# Altium PCB ASB.PcbDoc (part 1 of 2)
Units mm, origin at the board's own origin, x right, y up, seen from the top; angles counter-clockwise.
Board outline 200 x 150 mm, 4 copper layers (Top Layer, Int1 (GND), Int2, Bottom Layer), stack 1.369 mm thick; 134 components, 97 nets, 431 pads, 0 vias.
Unrouted connection lines stored in the file: 248.
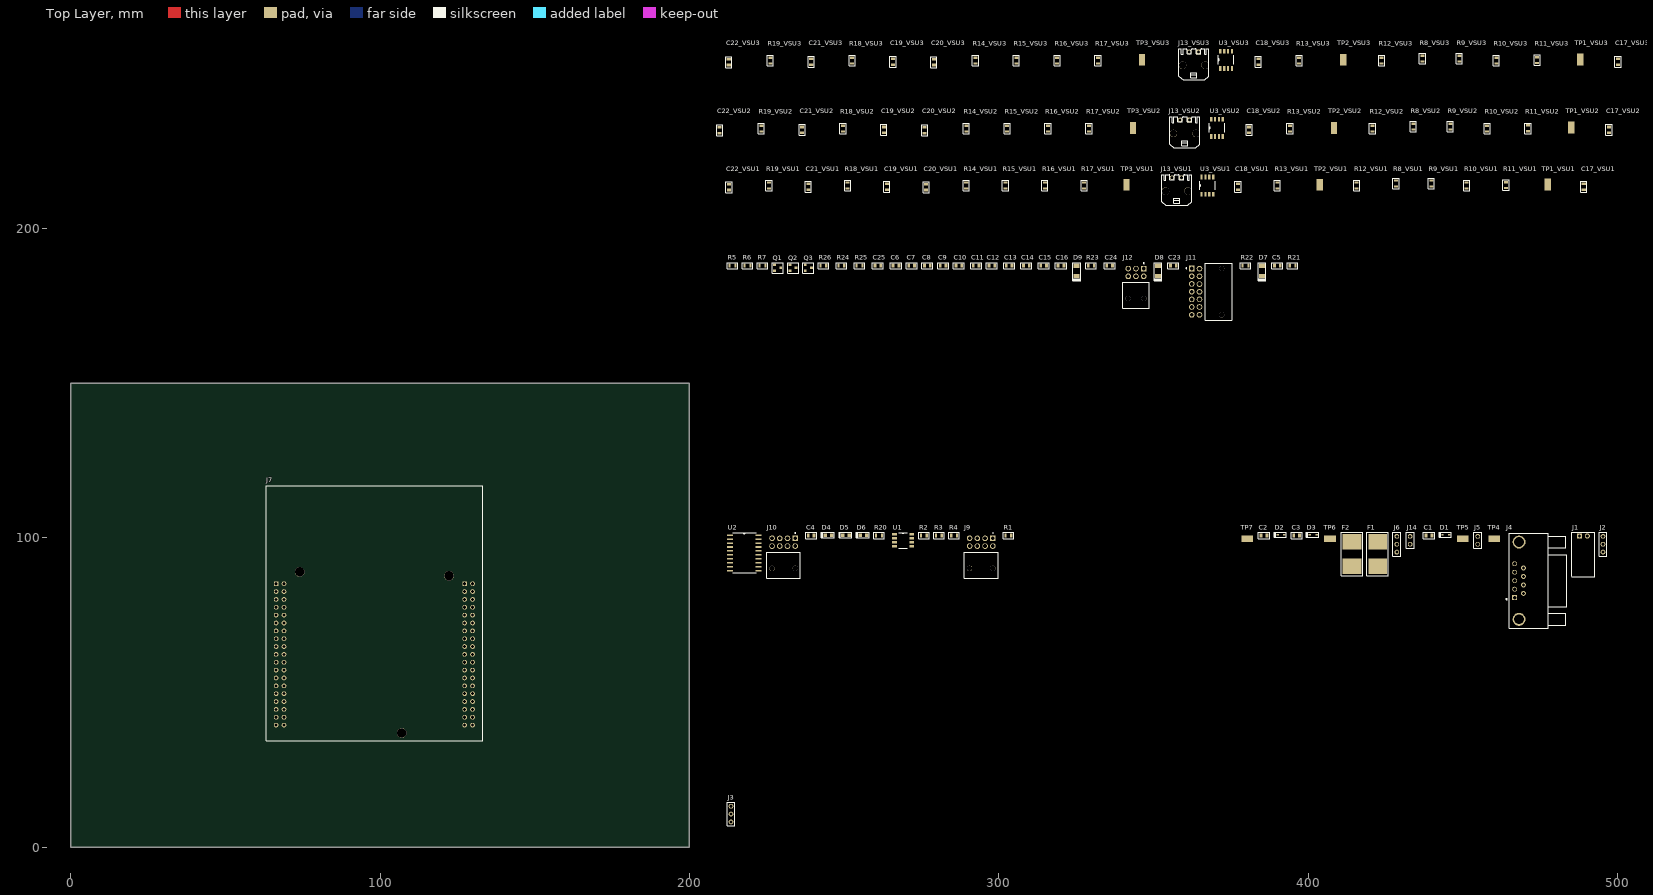
[diagram p0: Top Layer view]
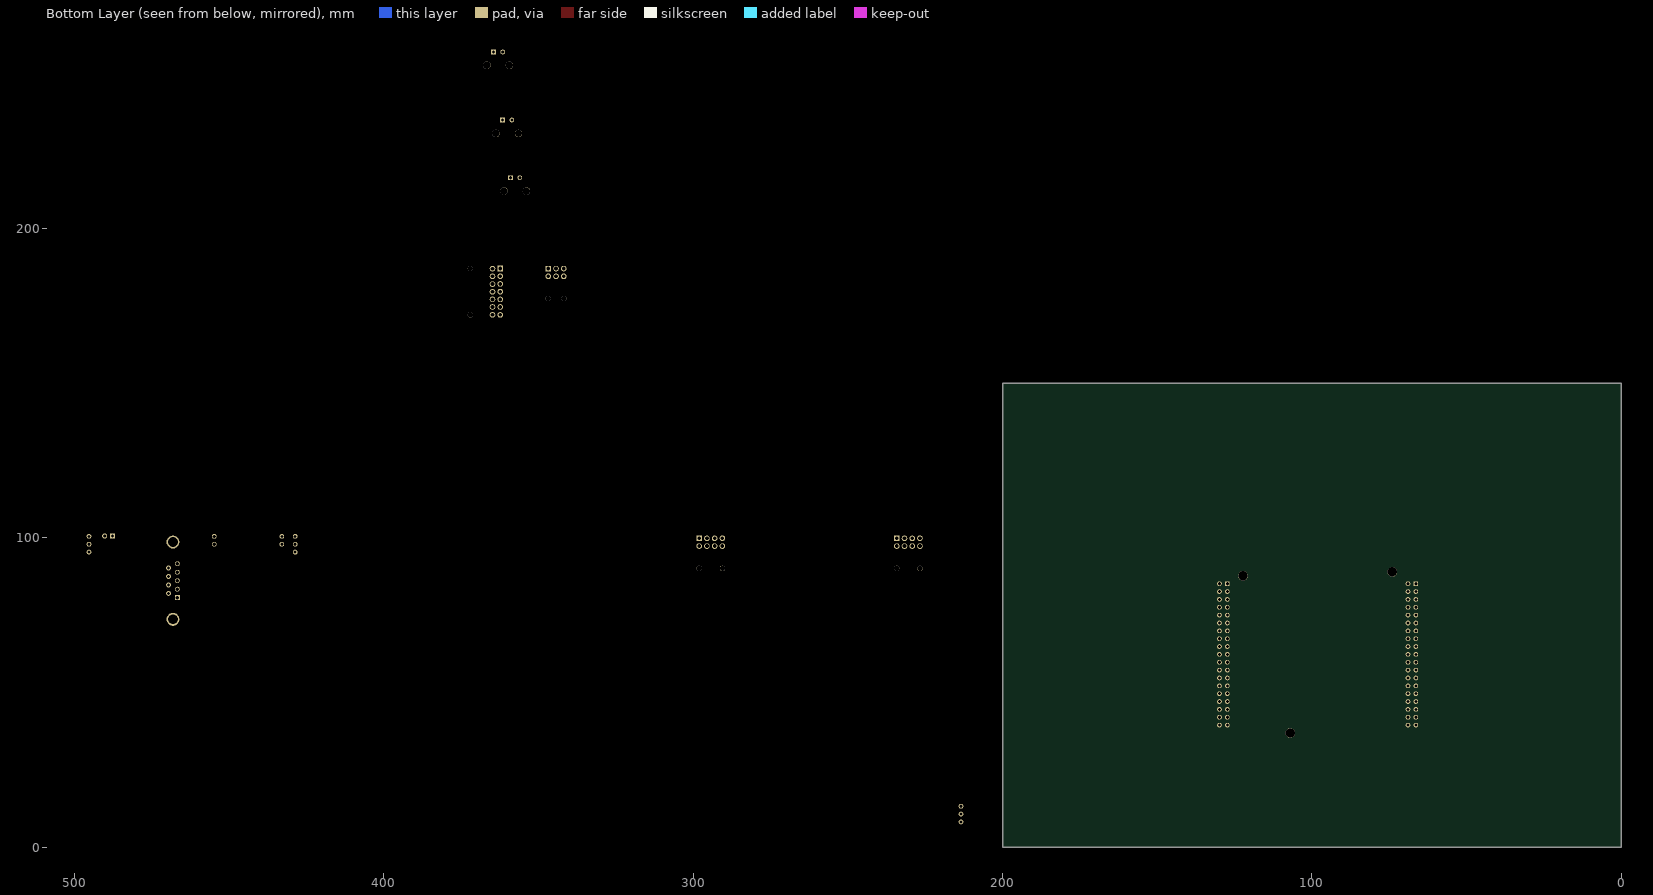
[diagram p1: Bottom Layer view, seen from below]
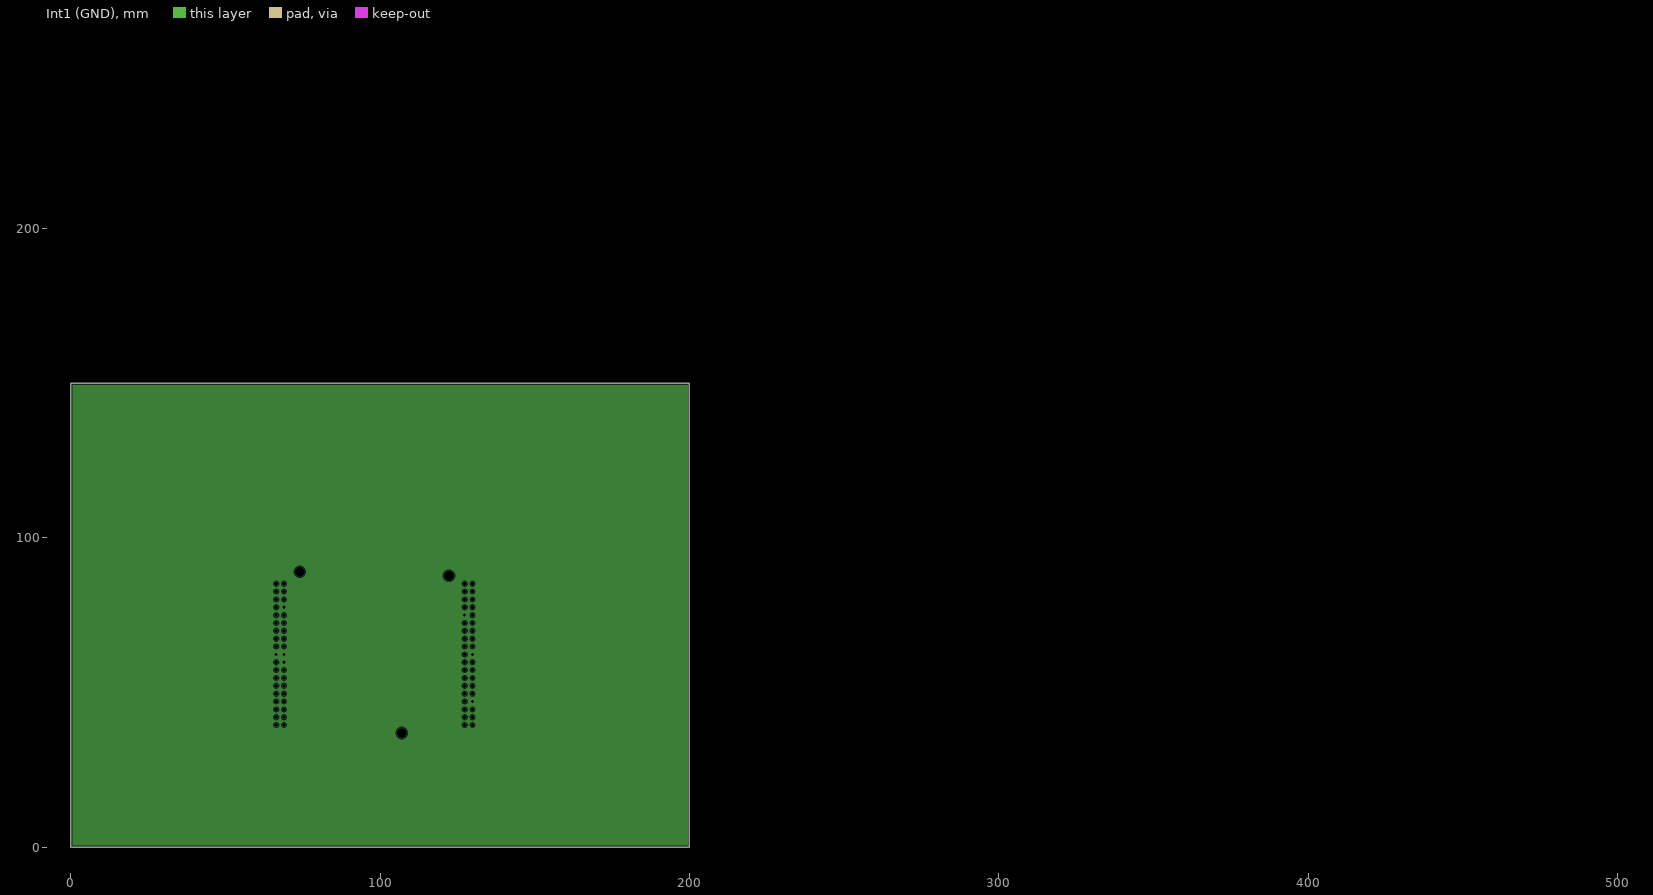
[diagram p2: Int1 (GND), clearances drawn from the general rule]

## Layer stack, top to bottom
Top Solder: solder mask 0.0254, SM-001, Dk 4
Top Layer: signal copper 0.035
Dielectric 1: prepreg 0.1295, PP-017, Dk 4.3
Dielectric 2: prepreg 0.1295, PP-017, Dk 4.3
Int1 (GND): plane copper 0.035, net GND
Dielectric 3: core 0.7112, Core-039, Dk 4.8
Int2: signal copper 0.035
Dielectric 4: prepreg 0.1295, PP-017, Dk 4.3
Dielectric 5: prepreg 0.1295, PP-017, Dk 4.3
Bottom Layer: signal copper 0.035
Bottom Solder: solder mask 0.0254, SM-001, Dk 4

## Board outline
0,0 200,0 200,150 0,150

## Design rules (kind name [scope] priority, off if disabled: settings)
Clearance [All] p1: gap=0.3 ignorepadtopadclearanceinfootprint=TRUE
PlaneClearance [All] p1: clearance=0.508
PlaneConnect [All] p1: planeconnectstyle=Relief reliefexpansion=0.5 reliefentries=4 reliefconductorwidth=0.25 reliefairgap=0.25
PolygonConnect [All] p1: connectstyle=Relief reliefconductorwidth=0.254 reliefentries=4 polygonreliefangle="90 Angle" airgapwidth=0.254
RoomDefinition VSU3 [InComponentClass('VSU3')] p1: confinementstyle=ConfineIn formatcopy=TRUE lockcomponents=FALSE outline 211.448,247.838 511.295,247.838 511.295,261.173 211.448,261.173
RoomDefinition VSU2 [InComponentClass('VSU2')] p2: confinementstyle=ConfineIn formatcopy=TRUE lockcomponents=FALSE outline 208.51,225.838 508.357,225.838 508.357,239.173 208.51,239.173
RoomDefinition VSU1 [InComponentClass('VSU1')] p3: confinementstyle=ConfineIn formatcopy=TRUE lockcomponents=FALSE outline 211.524,207.192 499.687,207.192 499.687,220.527 211.524,220.527
RoomDefinition ASB [InComponentClass('ASB')] p4 off: confinementstyle=ConfineIn formatcopy=TRUE lockcomponents=FALSE outline 211.916,6.644 497.285,6.644 497.285,191.81 211.916,191.81
RoutingVias [All] p1: holewidth=0.6 width=1 viastyle="Through Hole" minholewidth=0.6 minwidth=1 maxholewidth=0.6 maxwidth=1
SolderMaskExpansion [All] p1: expansion=0.102
UnRoutedNet [All] p1: checkbadconnections=TRUE
Width Width_Power [(InNet('3.3V') OR InNet('5V') OR InNet('12V') OR InNet('Ext 3V3') OR InNet('Ext 5V') OR InNet('GND') OR InNet('STM3V3_Out') OR InNet('STM5V_In') OR InNet('STM5V_Out') OR InNet('STM_VIN'))] p1: maxlimit=0.5 minlimit=0.4 preferedwidth=0.5
Width [All] p2: maxlimit=0.4 minlimit=0.2 preferedwidth=0.3
27 further rules are at their usual default settings.

## Classes and differential pairs
channel class "Voltage Sense Unit": VSU1 VSU2 VSU3
component class VSU3: C17_VSU3 C18_VSU3 C19_VSU3 C20_VSU3 C21_VSU3 C22_VSU3 J13_VSU3 R8_VSU3 R9_VSU3 R10_VSU3 R11_VSU3 R12_VSU3 R13_VSU3 R14_VSU3 R15_VSU3 R16_VSU3 R17_VSU3 R18_VSU3 R19_VSU3 TP1_VSU3 TP2_VSU3 TP3_VSU3 U3_VSU3
component class VSU2: C17_VSU2 C18_VSU2 C19_VSU2 C20_VSU2 C21_VSU2 C22_VSU2 J13_VSU2 R8_VSU2 R9_VSU2 R10_VSU2 R11_VSU2 R12_VSU2 R13_VSU2 R14_VSU2 R15_VSU2 R16_VSU2 R17_VSU2 R18_VSU2 R19_VSU2 TP1_VSU2 TP2_VSU2 TP3_VSU2 U3_VSU2
component class VSU1: C17_VSU1 C18_VSU1 C19_VSU1 C20_VSU1 C21_VSU1 C22_VSU1 J13_VSU1 R8_VSU1 R9_VSU1 R10_VSU1 R11_VSU1 R12_VSU1 R13_VSU1 R14_VSU1 R15_VSU1 R16_VSU1 R17_VSU1 R18_VSU1 R19_VSU1 TP1_VSU1 TP2_VSU1 TP3_VSU1 U3_VSU1
component class ASB: C1 C2 C3 C4 C5 C6 C7 C8 C9 C10 C11 C12 C13 C14 C15 C16 C23 C24 C25 D1 D2 D3 D4 D5 D6 D7 D8 D9 F1 F2 J1 J2 J3 J4 J5 J6 J7 J9 J10 J11 J12 J14 Q1 Q2 Q3 R1 R2 R3 R4 R5 R6 R7 R20 R21 R22 R23 R24 R25 R26 TP4 TP5 TP6 TP7 U1 U2

## Components (designator, comment, footprint, x,y, rotation, side; value= is the part's Value field where it differs from the comment)
C1 "10nF" C0805 439.119,100.751 r0 top
C2 "10nF" C0805 385.779,100.751 r0 top
C3 "10nF" C0805 396.32,100.751 r0 top
C4 "0.1uF" C0805 239.348,100.751 r0 top
C5 "1uF" C0805 390.097,188 r0 top
C6 "1nF" C0805 266.78,188 r0 top
C7 "1nF" C0805 271.86,188 r0 top
C8 "1nF" C0805 276.94,188 r0 top
C9 "1nF" C0805 282.02,188 r0 top
C10 "1nF" C0805 287.1,188 r0 top
C11 "1nF" C0805 292.688,188 r0 top
C12 "1nF" C0805 297.768,188 r0 top
C13 "1nF" C0805 303.356,188 r0 top
C14 "1nF" C0805 308.944,188 r0 top
C15 "1nF" C0805 314.532,188 r0 top
C16 "1nF" C0805 320.12,188 r0 top
C17_VSU1 "0.33uF" C0805 489.146,213.542 r90 top (schematic designator C17)
C17_VSU2 "0.33uF" C0805 497.308,231.934 r90 top (schematic designator C17)
C17_VSU3 "0.33uF" C0805 500.246,253.934 r90 top (schematic designator C17)
C18_VSU1 "0.33uF" C0805 377.386,213.542 r90 top (schematic designator C18)
C18_VSU2 "0.33uF" C0805 380.976,231.934 r90 top (schematic designator C18)
C18_VSU3 "0.33uF" C0805 383.914,253.934 r90 top (schematic designator C18)
C19_VSU1 "0.1uF" C0805 263.848,213.542 r90 top (schematic designator C19)
C19_VSU2 "0.1uF" C0805 262.866,231.934 r90 top (schematic designator C19)
C19_VSU3 "0.1uF" C0805 265.804,253.934 r90 top (schematic designator C19)
C20_VSU1 "0.1uF" C0805 276.548,213.415 r90 top (schematic designator C20)
C20_VSU2 "0.1uF" C0805 276.074,231.807 r90 top (schematic designator C20)
C20_VSU3 "0.1uF" C0805 279.012,253.807 r90 top (schematic designator C20)
C21_VSU1 "0.33uF" C0805 238.448,213.542 r90 top (schematic designator C21)
C21_VSU2 "0.33uF" C0805 236.45,231.934 r90 top (schematic designator C21)
C21_VSU3 "0.33uF" C0805 239.388,253.934 r90 top (schematic designator C21)
C22_VSU1 "0.33uF" C0805 212.794,213.415 r90 top (schematic designator C22)
C22_VSU2 "0.33uF" C0805 209.78,231.807 r90 top (schematic designator C22)
C22_VSU3 "0.33uF" C0805 212.718,253.807 r90 top (schematic designator C22)
C23 "0.1uF" C0805 356.442,188 r0 top
C24 "0.1uF" C0805 335.868,188 r0 top
C25 "0.1uF" C0805 260.938,188 r0 top
D1 "TVS Diode 12V" SOD-323 444.58,101.005 r0 top
D2 "TVS Diode 3V3" SOD-323 391.24,101.005 r0 top
D3 "TVS Diode 5V" SOD-323 401.654,101.005 r0 top
D4 "Green LED" L0805 244.936,100.878 r0 top
D5 "Yellow LED" L0805 250.651,100.878 r0 top
D6 "Red LED" L0805 256.239,100.878 r0 top
D7 "Diode 50V 1A" CGRKM4001-HF 385.144,186.349 r90 top
D8 "Diode 50V 1A" CGRKM4001-HF 351.489,186.349 r90 top
D9 "Diode 50V 1A" CGRKM4001-HF 325.2,186.349 r90 top
F1 "Fuseholder" "SCHURTER - 0031.7701.11 - FUSE HOLDER, PCB MOUNT" 422.482,94.782 r90 top
F2 "Fuseholder" "SCHURTER - 0031.7701.11 - FUSE HOLDER, PCB MOUNT" 414.227,94.782 r90 top
J1 "1x2 Header, RA, Shrouded" MOLEX_0705530001 487.76,100.624 r0 top
J2 "1x3 HDR100" "MOLEX 0901200763" 495.38,95.417 r90 top
J3 "1x3 HDR100" "MOLEX 0901200763" 213.44,8.168 r90 top
J4 "D-Sub9 Header, RA" "D9 Connector" 473.409,86.273 r90 top
J5 "1x2 HDR100" "Molex 0901200762" 454.867,97.957 r90 top
J6 "1x3 HDR100" "MOLEX 0901200763" 428.705,95.417 r90 top
J7 "(2x19 Morpho Socket) x2" "STM32 Nucleo Footprint]" 98.13,75.68 r0 top
J9 "2x4 Socket, RA" "Molex 105314 8 CON" 294.339,95.417 r0 top
J10 "2x4 Socket, RA" "Molex 105314 8 CON" 230.458,95.417 r0 top
J11 "2x7 Socket, RA" "MOLEX 105314 14 CON" 362.411,187.111 r90 top
J12 "2x3 Socket, RA" "MOLEX 105314 6 CON" 344.377,182.666 r0 top
J13_VSU1 "1x2 Header, RA" "Right Angle Header 43650-0205(Primary)" 357.574,212.145 r0 top (schematic designator J13)
J13_VSU2 "1x2 Header, RA" "Right Angle Header 43650-0205(Primary)" 360.148,230.791 r0 top (schematic designator J13)
J13_VSU3 "1x2 Header, RA" "Right Angle Header 43650-0205(Primary)" 363.086,252.791 r0 top (schematic designator J13)
J14 "1x2 HDR100" "Molex 0901200762" 433.023,97.957 r90 top
Q1 "DMG6968U" "MOSFET DMG6968UDICT-ND" 227.537,188.254 r0 top
Q2 "DMG6968U" "MOSFET DMG6968UDICT-ND" 232.49,188.254 r0 top
Q3 "DMG6968U" "MOSFET DMG6968UDICT-ND" 237.443,188.254 r0 top
R1 "1K" R0805 303.102,100.751 r0 top
R2 "150" R0805 275.797,100.751 r0 top
R3 "150" R0805 280.623,100.751 r0 top
R4 "150" R0805 285.576,100.751 r0 top
R5 "20K" R0805 213.948,188 r0 top
R6 "20K" R0805 218.774,188 r0 top
R7 "20K" R0805 223.6,188 r0 top
R8_VSU1 "3K" R0805 428.44,214.558 r90 top (schematic designator R8)
R8_VSU2 "3K" R0805 434.062,232.95 r90 top (schematic designator R8)
R8_VSU3 "3K" R0805 437,254.95 r90 top (schematic designator R8)
R9_VSU1 "3K" R0805 439.87,214.558 r90 top (schematic designator R9)
R9_VSU2 "3K" R0805 446,232.95 r90 top (schematic designator R9)
R9_VSU3 "3K" R0805 448.938,254.95 r90 top (schematic designator R9)
R10_VSU1 "3K" R0805 451.3,213.923 r90 top (schematic designator R10)
R10_VSU2 "3K" R0805 457.938,232.315 r90 top (schematic designator R10)
R10_VSU3 "3K" R0805 460.876,254.315 r90 top (schematic designator R10)
R11_VSU1 "20K" R0805 464,214.05 r90 top (schematic designator R11)
R11_VSU2 "20K" R0805 471.146,232.442 r90 top (schematic designator R11)
R11_VSU3 "20K" R0805 474.084,254.442 r90 top (schematic designator R11)
R12_VSU1 "6.2K" R0805 415.74,213.923 r90 top (schematic designator R12)
R12_VSU2 "6.2K" R0805 420.854,232.315 r90 top (schematic designator R12)
R12_VSU3 "6.2K" R0805 423.792,254.315 r90 top (schematic designator R12)
R13_VSU1 "1K" R0805 390.086,213.923 r90 top (schematic designator R13)
R13_VSU2 "1K" R0805 394.184,232.315 r90 top (schematic designator R13)
R13_VSU3 "1K" R0805 397.122,254.315 r90 top (schematic designator R13)
R14_VSU1 "3K" R0805 289.502,213.923 r90 top (schematic designator R14)
R14_VSU2 "3K" R0805 289.536,232.315 r90 top (schematic designator R14)
R14_VSU3 "3K" R0805 292.474,254.315 r90 top (schematic designator R14)
R15_VSU1 "3K" R0805 302.202,213.923 r90 top (schematic designator R15)
R15_VSU2 "3K" R0805 302.744,232.315 r90 top (schematic designator R15)
R15_VSU3 "3K" R0805 305.682,254.315 r90 top (schematic designator R15)
R16_VSU1 "3K" R0805 314.902,213.923 r90 top (schematic designator R16)
R16_VSU2 "3K" R0805 315.952,232.315 r90 top (schematic designator R16)
R16_VSU3 "3K" R0805 318.89,254.315 r90 top (schematic designator R16)
R17_VSU1 "20K" R0805 327.602,213.923 r90 top (schematic designator R17)
R17_VSU2 "20K" R0805 329.16,232.315 r90 top (schematic designator R17)
R17_VSU3 "20K" R0805 332.098,254.315 r90 top (schematic designator R17)
R18_VSU1 "6.2K" R0805 251.148,213.923 r90 top (schematic designator R18)
R18_VSU2 "6.2K" R0805 249.658,232.315 r90 top (schematic designator R18)
R18_VSU3 "6.2K" R0805 252.596,254.315 r90 top (schematic designator R18)
R19_VSU1 "1K" R0805 225.748,213.923 r90 top (schematic designator R19)
R19_VSU2 "1K" R0805 223.242,232.315 r90 top (schematic designator R19)
R19_VSU3 "1K" R0805 226.18,254.315 r90 top (schematic designator R19)
R20 "120" R0805 261.319,100.751 r0 top
R21 "1K" R0805 395.05,188 r0 top
R22 "1K" R0805 379.81,188 r0 top
R23 "1K" R0805 329.899,188 r0 top
R24 "150" R0805 249.127,188 r0 top
R25 "150" R0805 254.969,188 r0 top
R26 "150" R0805 243.285,188 r0 top
TP1_VSU1 "SMD Test Point" "5019 Keystone SMT Test Point" 477.462,214.304 r90 top (schematic designator TP1)
TP1_VSU2 "SMD Test Point" "5019 Keystone SMT Test Point" 485.116,232.696 r90 top (schematic designator TP1)
TP1_VSU3 "SMD Test Point" "5019 Keystone SMT Test Point" 488.054,254.696 r90 top (schematic designator TP1)
TP2_VSU1 "SMD Test Point" "5019 Keystone SMT Test Point" 403.802,214.177 r90 top (schematic designator TP2)
TP2_VSU2 "SMD Test Point" "5019 Keystone SMT Test Point" 408.408,232.569 r90 top (schematic designator TP2)
TP2_VSU3 "SMD Test Point" "5019 Keystone SMT Test Point" 411.346,254.569 r90 top (schematic designator TP2)
TP3_VSU1 "SMD Test Point" "5019 Keystone SMT Test Point" 341.318,214.177 r90 top (schematic designator TP3)
TP3_VSU2 "SMD Test Point" "5019 Keystone SMT Test Point" 343.384,232.569 r90 top (schematic designator TP3)
TP3_VSU3 "SMD Test Point" "5019 Keystone SMT Test Point" 346.322,254.569 r90 top (schematic designator TP3)
TP4 "SMD Test Point" "5019 Keystone SMT Test Point" 460.201,99.735 r0 top
TP5 "SMD Test Point" "5019 Keystone SMT Test Point" 450.041,99.735 r0 top
TP6 "SMD Test Point" "5019 Keystone SMT Test Point" 407.115,99.735 r0 top
TP7 "SMD Test Point" "5019 Keystone SMT Test Point" 380.318,99.735 r0 top
U1 "CAN, MCP2551" LT1677IS8#TRPBF 269.066,99.227 r0 top
U2 "ADC, TLV2556" DW20-L 217.758,95.163 r0 top
U3_VSU1 "OpAmp, LT1677" LT1677IS8#TRPBF 367.48,213.923 r90 top (schematic designator U3)
U3_VSU2 "OpAmp, LT1677" LT1677IS8#TRPBF 370.562,232.569 r90 top (schematic designator U3)
U3_VSU3 "OpAmp, LT1677" LT1677IS8#TRPBF 373.5,254.569 r90 top (schematic designator U3)

## Footprints (in the part's own frame and the unit in brackets; to place one, negate y for a bottom-side part, rotate by r counter-clockwise, add the part's x,y. Pads: shape width x height; smd on the part's side, far side on the other; paste and mask are expansions set on the pad)
"5019 Keystone SMT Test Point" [mil]
  rect 150x80 smd: 1(0,0)
  body extent -75,-40 75,40, height 86
C0805 [mm]
  rect 0.9x1.3 smd: 1(-0.95,0) 2(0.95,0)
  silkscreen extent -1.8,-1 1.8,1, body extent -1.05,-0.67 1.05,0.67, height 0.94
CGRKM4001-HF [mil]
  rect 55x75 smd: 1(-65,0) 2(65,0)
  silkscreen extent -125,-50 105,50, body extent -73,-36 73,36, height 67
"D9 Connector" [mil]
  rect 61.5x61.5 hole 41: 1(-220,260)
  round 61.5 hole 41: 2(-112,260) 3(-4,260) 4(104,260) 5(212,260) 6(-166,148) 7(-58,148) 8(50,148) 9(158,148)
  round 165 hole 125: G1(-496,204) G2(488,204)
  silkscreen extent -610,-405 602,371, body extent -619,-415 609,340, height 509
DW20-L [mil]
  rect 75x20 smd: 1(-182.5,225) 2(-182.5,175) 3(-182.5,125) 4(-182.5,75) 5(-182.5,25) 6(-182.5,-25) 7(-182.5,-75) 8(-182.5,-125) 9(-182.5,-175) 10(-182.5,-225) 11(182.5,-225) 12(182.5,-175) 13(182.5,-125) 14(182.5,-75) 15(182.5,-25) 16(182.5,25) 17(182.5,75) 18(182.5,125) 19(182.5,175) 20(182.5,225)
  silkscreen extent -150,-256 150,256, body extent -210,-256 210,256, height 104
L0805 [mm]
  rect 1.2x1.2 smd: 1(-1.05,0) 2(1.05,0)
  silkscreen extent -2.29,-0.89 1.91,0.89, body extent -1,-0.62 1,0.63, height 0.82
LT1677IS8#TRPBF [mil] "IC OPAMP GP 7.2MHZ RRO 8SO"
  rect 60x30 smd: 1(-110,75) 2(-110,25) 3(-110,-25) 4(-110,-75) 5(110,-75) 6(110,-25) 7(110,25) 8(110,75)
  silkscreen extent -56,-99 56,99, body extent -121,-98 121,98, height 79
"MOLEX 105314 6 CON" [mm]
  rect 1.8x1.8 hole 1.2: 1(2.5,4.408)
  round 1.8 hole 1.2: 2(0,4.408) 3(-2.5,4.408) 4(2.5,1.908) 5(0,1.908) 6(-2.5,1.908)
  round 1.7 hole 1.7 unplated: None(-2.5,-5.272) None(2.5,-5.272)
  silkscreen extent -4.22,-8.47 4.22,6.28, body extent -4.22,-9.87 4.22,4.79, height 8.85
"Molex 105314 8 CON" [mm]
  rect 1.8x1.8 hole 1.2: 1(3.75,4.441)
  round 1.8 hole 1.2: 2(1.25,4.441) 3(-3.75,1.941) 3(-1.25,4.441) 4(-3.75,4.478) 5(3.75,1.941) 6(1.25,1.941) 7(-1.25,1.941)
  round 1.7 hole 1.7 unplated: None(-3.75,-5.26) None(3.75,-5.26)
  silkscreen extent -5.48,-8.44 5.45,6.31, body extent -5.47,-9.88 5.47,4.78, height 8.85
"MOLEX 105314 14 CON" [mm]
  rect 1.8x1.8 hole 1.2: 1(0,0)
  round 1.8 hole 1.2: 2(-2.5,0) 3(-5,0) 4(-7.5,0) 5(-10,0) 6(-12.45,0) 7(-14.992,0) 8(-0.05,-2.5) 9(-2.55,-2.5) 10(-5.05,-2.5) 11(-7.55,-2.5) 12(-10,-2.5) 13(-12.45,-2.5) 14(-14.992,-2.5)
  round 1.7 hole 1.7 unplated: None(-14.992,-9.68) None(0,-9.68)
  silkscreen extent -16.71,-12.88 1.72,1.87, body extent -16.71,-14.31 1.73,0.34, height 9.15
"Molex 0901200762" [mil]
  round 60 hole 39.37: 1(0,0) 2(100,0)
  silkscreen extent -50,-50 150,50, body extent -50,-49 150,49, height 365
"MOLEX 0901200763" [mil]
  round 60 hole 39.37: 1(0,0) 2(100,0) 3(200,0)
  silkscreen extent -50,-50 250,50, body extent -50,-49 250,49, height 365
MOLEX_0705530001 [mm]
  rect 1.635x1.635 hole 1.09: 1(0,0)
  round 1.635 hole 1.09: 2(2.54,0)
  silkscreen extent -2.41,-13.17 4.95,1.14, body extent -2.41,-12.89 4.95,0.7, height 6.62
"MOSFET DMG6968UDICT-ND" [mm]
  rect 0.9x0.8 smd: 1(0,0) 2(2,-0.95) 3(0,-1.9)
  silkscreen extent -0.76,-2.67 2.79,0.76, body extent -0.4,-2.44 2.43,0.56, height 1.2
R0805 [mm]
  rect 0.7x1.3 smd: 1(-0.95,0) 2(0.95,0)
  silkscreen extent -1.7,-1 1.7,1, body extent -1.05,-0.67 1.05,0.68, height 0.6
"Right Angle Header 43650-0205(Primary)" [mm]
  round 2.413 hole 2.413 unplated: None(-3.645,0) None(3.645,0)
  rect 1.53x1.53 hole 1.02: P$1(1.5,4.32)
  round 1.53 hole 1.02: P$2(-1.5,4.32)
  silkscreen extent -4.82,-4.6 4.82,5.3, body extent -4.83,-4.59 4.83,5.31, height 5.58
"SCHURTER - 0031.7701.11 - FUSE HOLDER, PCB MOUNT" [mm]
  rect 5x6 smd: 1(-4,0) 2(4,0)
  silkscreen extent -6.98,-3.43 6.98,3.43, body extent -6.04,-2.6 6.04,2.6, height 6.01
SOD-323 [mm] "SOD, 2-Leads, Body 1.7x1.25mm"
  rect 0.8x0.6 smd: 1(-1.1,0) 2(1.1,0)
  silkscreen extent -2.16,-0.76 1.78,0.76, body extent -1.3,-0.67 1.3,0.68, height 1.1
"STM32 Nucleo Footprint]" [mm]
  rect 1.508x1.508 hole 1: 1L(-31.75,9.51) 1R(29.21,9.51)
  round 1.508 hole 1: 2L(-29.21,9.51) 2R(31.75,9.51) 3L(-31.75,6.97) 3R(29.21,6.97) 4L(-29.21,6.97) 4R(31.75,6.97) 5L(-31.75,4.43) 5R(29.21,4.43) 6L(-29.21,4.43) 6R(31.75,4.43) 7L(-31.75,1.89) 7R(29.21,1.89) 8L(-29.21,1.89) 8R(31.75,1.89) 9L(-31.75,-0.65) 9R(29.21,-0.65) 10L(-29.21,-0.65) 10R(31.75,-0.65) 11L(-31.75,-3.19) 11R(29.21,-3.19) 12L(-29.21,-3.19) 12R(31.75,-3.19) 13L(-31.75,-5.73) 13R(29.21,-5.73) 14L(-29.21,-5.73) 14R(31.75,-5.73) 15L(-31.75,-8.27) 15R(29.21,-8.27) 16L(-29.21,-8.27) 16R(31.75,-8.27) 17L(-31.75,-10.81) 17R(29.21,-10.81) 18L(-29.21,-10.81) 18R(31.75,-10.81) 19L(-31.75,-13.35) 19R(29.21,-13.35) 20L(-29.21,-13.35) 20R(31.75,-13.35) 21L(-31.75,-15.89) 21R(29.21,-15.89) 22L(-29.21,-15.89) 22R(31.75,-15.89) 23L(-31.75,-18.43) 23R(29.21,-18.43) 24L(-29.21,-18.43) 24R(31.75,-18.43) 25L(-31.75,-20.97) 25R(29.21,-20.97) 26L(-29.21,-20.97) 26R(31.75,-20.97) 27L(-31.75,-23.51) 27R(29.21,-23.51) 28L(-29.21,-23.51) 28R(31.75,-23.51) 29L(-31.75,-26.05) 29R(29.21,-26.05) 30L(-29.21,-26.05) 30R(31.75,-26.05) 31L(-31.75,-28.59) 31R(29.21,-28.59) 32L(-29.21,-28.59) 32R(31.75,-28.59) 33L(-31.75,-31.13) 33R(29.21,-31.13) 34L(-29.21,-31.13) 34R(31.75,-31.13) 35L(-31.75,-33.67) 35R(29.21,-33.67) 36L(-29.21,-33.67) 36R(31.75,-33.67) 37L(-31.75,-36.21) 37R(29.21,-36.21) 38L(-29.21,-36.21) 38R(31.75,-36.21)
  round 3.05 hole 3.05 unplated: None(-24.13,13.32) None(8.89,-38.75) None(24.13,12.05)
  silkscreen extent -35,-41.25 35,41.25

## Part data
C1 C2 C3: library part CL21B103KBANNNC, "Cap Ceramic 0.01uF 50V X7R 10% SMD 0805 125C Paper T/R", Case/Package=0805, Case Code (Metric)=2012, Dielectric=X7R, Manufacturer=Samsung, Max Operating Temperature=125°C, Min Operating Temperature=-55°C, Supplier Part Number 1=1276-1015-1-ND, Tolerance=10%, Voltage=50V, Capacitance=10nF, Case Code (Imperial)=0805, Category=Capacitors, ComponentLink1Description=https://datasheet.ciiva.com/25709/cl21b103kbannnc-25709781.pdf?src-supplier=Digi-Key, ComponentLink1URL=https://datasheet.ciiva.com/25709/cl21b103kbannnc-25709781.pdf?src-supplier=Digi-Key, ComponentLink2Description=https://datasheet.ciiva.com/26838/getdatasheetpartid-358359-26838647.pdf?src-supplier=Verical, ComponentLink2URL=https://datasheet.ciiva.com/26838/getdatasheetpartid-358359-26838647.pdf?src-supplier=Verical, ComponentLink3Description=https://datasheet.ciiva.com/29199/455082-da-01-en-vs-kondensator-0805-29199459.pdf?src-supplier=Conrad, ComponentLink3URL=https://datasheet.ciiva.com/29199/455082-da-01-en-vs-kondensator-0805-29199459.pdf?src-supplier=Conrad, ComponentLink4Description=https://datasheet.ciiva.com/16199/cl05b104kq5nnnc-16199304.pdf?src-supplier=Future+Electronics, ComponentLink4URL=https://datasheet.ciiva.com/16199/cl05b104kq5nnnc-16199304.pdf?src-supplier=Future+Electronics, ComponentLink5Description=https://datasheet.ciiva.com/26310/mlcc-catalogdownload2013-eng-26310223.pdf?src-supplier=Distrelec, ComponentLink5URL=https://datasheet.ciiva.com/26310/mlcc-catalogdownload2013-eng-26310223.pdf?src-supplier=Distrelec, Contact Plating=Tin, Depth=1.25mm, Height=0.65mm, Lead Free="Lead Free", Length=2mm, Manufacturer Part Number=CL21B103KBANNNC, Material=Ceramic, Mount="Surface Mount", Packaging="Tape and Reel", Pricing 1="1 = 0.10000, 10 = 0.04100, 100 = 0.01830, 500 = 0.01310, 1000 = 0.01030 (USD)", Radiation Hardening=No, RoHS=Yes, Stock 1=5594647, Supplier 1=Digi-Key, Thickness=0.03inch, Voltage Rating=50V, Voltage Rating (DC)=50V, Width=0.049inch
C4 C19_VSU1 C19_VSU2 C19_VSU3 C20_VSU1 C20_VSU2 C20_VSU3 C23 C24 C25: library part CL21B104KBCWPNC, "CAP CER 0.1UF 50V X7R 0805", Capacitance=100nF, Case/Package=0805, Case Code (Metric)=2012, Manufacturer=Samsung, Max Operating Temperature=125°C, Min Operating Temperature=-55°C, Ratings=AEC-Q200, Supplier Part Number 1=1276-6557-1-ND, Tolerance=10%, Voltage Rating=50V, Case Code (Imperial)=0805, Category=Capacitors, Features="Soft Termination", Length=0.079inch, Manufacturer Part Number=CL21B104KBCWPNC, Mount="Surface Mount", Packaging="Tape and Reel", Pricing 1="1 = 0.10000, 10 = 0.06700, 100 = 0.02990, 500 = 0.02138, 1000 = 0.01680 (USD)", RoHS=Yes, Stock 1=6545, Supplier 1=Digi-Key, Thickness=0.053inch, Width=0.049inch
C5: library part CL21B105KAFNNNE, "Cap Ceramic 1uF 25V X7R 10% SMD 0805 125C T/R", Case/Package=0805, Case Code (Metric)=2012, Dielectric=X7R, Manufacturer=Samsung, Max Operating Temperature=125°C, Min Operating Temperature=-55°C, Package Quantity=1, Supplier Part Number 1=1276-1066-1-ND, Tolerance=10%, Voltage=25V, Capacitance=1uF, Case Code (Imperial)=0805, Category=Capacitors, ComponentLink1Description=https://datasheet.ciiva.com/25800/cl21b105kafnnne-25800163.pdf?src-supplier=Digi-Key, ComponentLink1URL=https://datasheet.ciiva.com/25800/cl21b105kafnnne-25800163.pdf?src-supplier=Digi-Key, ComponentLink2Description=https://datasheet.ciiva.com/15195/getdatasheetpartid-355205-15195880.pdf?src-supplier=Verical, ComponentLink2URL=https://datasheet.ciiva.com/15195/getdatasheetpartid-355205-15195880.pdf?src-supplier=Verical, Contact Plating=Tin, Depth=1.25mm, Height=1.25mm, Lead Free="Lead Free", Length=2mm, Manufacturer Part Number=CL21B105KAFNNNE, Mount="Surface Mount", Packaging="Tape and Reel", Pricing 1="1 = 0.10000, 10 = 0.07600, 100 = 0.03380, 500 = 0.02416, 1000 = 0.01898 (USD)", Radiation Hardening=No, RoHS=Yes, Stock 1=1606570, Supplier 1=Digi-Key, Thickness=0.053inch, Voltage Rating=25V, Voltage Rating (DC)=25V, Width=0.049inch
C6 C7 C8 C9 C10 C11 C12 C13 C14 C15 C16: library part C0805C102J5HACAUTO, "CAP CER 0805 1NF 50V ULTRA STABL", Manufacturer=KEMET, Supplier Part Number 1=399-16591-1-ND, Category=Capacitors, ComponentLink1Description=https://api.kemet.com/component-edge/download/datasheet/C0805C102J5HACAUTO.pdf?src-supplier=Digi-Key, ComponentLink1URL=https://api.kemet.com/component-edge/download/datasheet/C0805C102J5HACAUTO.pdf?src-supplier=Digi-Key, Manufacturer Part Number=C0805C102J5HACAUTO, Pricing 1="1 = 0.21000, 10 = 0.15100, 100 = 0.07080, 500 = 0.04964, 1000 = 0.04109 (USD)", RoHS=No, Stock 1=1854, Supplier 1=Digi-Key
C17_VSU1 C17_VSU2 C17_VSU3 C18_VSU1 C18_VSU2 C18_VSU3 C21_VSU1 C21_VSU2 C21_VSU3 C22_VSU1 C22_VSU2 C22_VSU3: library part CL21B334KBFVPNE, "CAP CER 0.33UF 50V X7R 0805", Capacitance=330nF, Case/Package=0805, Case Code (Metric)=2012, Manufacturer=Samsung, Max Operating Temperature=125°C, Min Operating Temperature=-55°C, Ratings=AEC-Q200, Supplier Part Number 1=1276-6813-1-ND, Tolerance=10%, Voltage Rating=50V, Case Code (Imperial)=0805, Category=Capacitors, Features="Soft Termination", Length=0.079inch, Manufacturer Part Number=CL21B334KBFVPNE, Mount="Surface Mount", Packaging="Tape and Reel", Pricing 1="1 = 0.22000, 10 = 0.15200, 100 = 0.07690, 500 = 0.05260, 1000 = 0.04653 (USD)", RoHS=Yes, Stock 1=190572, Supplier 1=Digi-Key, Thickness=0.053inch, Width=0.049inch
D1: library part SD12T1G, "TVS DIODE 12V 19V SOD323", Breakdown Voltage=13.3V, Capacitance=150pF, Case/Package=SOD-323-2, Clamping Voltage=25V, Leakage Current=1uA, Manufacturer="ON Semiconductor", Max Breakdown Voltage=15.75V, Max Operating Temperature=150°C, Max Surge Current=15A, Min Operating Temperature=-55°C, Operating Supply Voltage=12V, Package Quantity=1, Peak Pulse Power=350W, Power Line Protection=No, Supplier Part Number 1=SD12T1GOSCT-ND, Test Current=1mA, Category="Circuit Protection", ComponentLink1Description=https://datasheet.ciiva.com/11193/sd05t1-d-11193474.pdf?src-supplier=Avnet, ComponentLink1URL=https://datasheet.ciiva.com/11193/sd05t1-d-11193474.pdf?src-supplier=Avnet, ComponentLink2Description=https://datasheet.ciiva.com/15143/getdatasheetpartid-52921-15143109.pdf?src-supplier=Verical, ComponentLink2URL=https://datasheet.ciiva.com/15143/getdatasheetpartid-52921-15143109.pdf?src-supplier=Verical, ComponentLink3Description=https://datasheet.ciiva.com/30479/0900766b81250bd7-30479026.pdf?src-supplier=RSComponents, ComponentLink3URL=https://datasheet.ciiva.com/30479/0900766b81250bd7-30479026.pdf?src-supplier=RSComponents, ComponentLink4Description=https://datasheet.ciiva.com/339/sd05t1-d-339833.pdf?src-supplier=Digi-Key, ComponentLink4URL=https://datasheet.ciiva.com/339/sd05t1-d-339833.pdf?src-supplier=Digi-Key, ComponentLink5Description=https://datasheet.ciiva.com/11193/sd05t1-d-11193470.pdf?src-supplier=Avnet, ComponentLink5URL=https://datasheet.ciiva.com/11193/sd05t1-d-11193470.pdf?src-supplier=Avnet, ComponentLink6Description=https://datasheet.ciiva.com/339/sd05t1-d-339832.pdf?src-supplier=Digi-Key, ComponentLink6URL=https://datasheet.ciiva.com/339/sd05t1-d-339832.pdf?src-supplier=Digi-Key, ComponentLink7Description=https://datasheet.ciiva.com/339/sd05t1-d-339834.pdf?src-supplier=Digi-Key, ComponentLink7URL=https://datasheet.ciiva.com/339/sd05t1-d-339834.pdf?src-supplier=Digi-Key, Composition=Zener, Contact Plating=Tin, Depth=1.25mm, Direction=Unidirectional, Element Configuration=Single, ESD Protection=Yes, Height=1mm, Lead Free="Lead Free", Length=1.7mm, Manufacturer Part Number=SD12T1G, Max Reverse Leakage Current=1uA, Min Breakdown Voltage=13.3V, Number of Channels=1, Number of Elements=1, Number of Pins=2, Number of Unidirectional Channels=1, Packaging="Tape and Reel", Peak Pulse Current=15A, Polarity=Unidirectional, Power Dissipation=350W, Pricing 1="1 = 0.47000, 10 = 0.34900, 100 = 0.19740, 500 = 0.13076, 1000 = 0.10025 (USD)", Radiation Hardening=No, Reverse Breakdown Voltage=13.3V, Reverse Standoff Voltage=12V, RoHS=Yes, Stock 1=159232, Supplier 1=Digi-Key, Termination=SMD/SMT, Voltage Rating (DC)=12V, Width=1.35mm, Working Voltage=12V
D2: library part CDSOD323-T03S, "ESD Suppressor TVS ±30kV 2-Pin SOD-323 T/R", Breakdown Voltage=4V, Capacitance=500pF, Case/Package=SOD-323-2, Clamping Voltage=10.9V, Leakage Current=125uA, Manufacturer=Bourns, Max Operating Temperature=150°C, Max Power Dissipation=500W, Max Surge Current=43A, Min Operating Temperature=-55°C, Operating Supply Voltage=3.3V, Package Quantity=3000, Power Line Protection=No, Supplier Part Number 1=CDSOD323-T03SCT-ND, Category="Circuit Protection", ComponentLink1Description=https://datasheet.ciiva.com/22685/1671000-22685541.pdf?src-supplier=Element14, ComponentLink1URL=https://datasheet.ciiva.com/22685/1671000-22685541.pdf?src-supplier=Element14, ComponentLink2Description=https://datasheet.ciiva.com/6575/cdsod323-txxsc-6575941.pdf?src-supplier=Digi-Key, ComponentLink2URL=https://datasheet.ciiva.com/6575/cdsod323-txxsc-6575941.pdf?src-supplier=Digi-Key, ComponentLink3Description=https://datasheet.ciiva.com/11193/cdsod323-txxsc-11193742.pdf?src-supplier=Avnet, ComponentLink3URL=https://datasheet.ciiva.com/11193/cdsod323-txxsc-11193742.pdf?src-supplier=Avnet, Composition=Zener, Contact Plating=Tin, Depth=1.45mm, Direction=Unidirectional, Element Configuration=Single, Length=1.9mm, Manufacturer Part Number=CDSOD323-T03S, Min Breakdown Voltage=4V, Mount="Surface Mount", Number of Channels=1, Number of Pins=2, Number of Unidirectional Channels=1, Packaging="Tape and Reel", Peak Pulse Current=43A, Peak Pulse Power=500W, Polarity=Unidirectional, Pricing 1="1 = 0.72000, 10 = 0.60600, 25 = 0.53000, 100 = 0.45420, 250 = 0.39368, 500 = 0.33310, 1000 = 0.25740 (USD)", Radiation Hardening=No, REACH SVHC="No SVHC", Reverse Standoff Voltage=3.3V, RoHS=Yes, Stock 1=99362, Supplier 1=Digi-Key, Termination=SMD/SMT, Working Voltage=3.3V
D3: library part SD05T1G, "TVS DIODE 5V 9.8V SOD323", Breakdown Voltage=6.75V, Capacitance=350pF, Case/Package=SOD-323-2, Clamping Voltage=14.5V, Leakage Current=10uA, Manufacturer="ON Semiconductor", Max Breakdown Voltage=7.3V, Max Operating Temperature=150°C, Max Output Current=24A, Max Power Dissipation=200mW, Min Breakdown Voltage=6.2V, Min Operating Temperature=-55°C, Operating Supply Voltage=5V, Package Quantity=1, Peak Pulse Power=350W, Power Line Protection=No, Supplier Part Number 1=SD05T1GOSCT-ND, Test Current=1mA, Category="Circuit Protection", ComponentLink1Description=https://datasheet.ciiva.com/4507/sd05t1-d-241634-4507873.pdf?src-supplier=Mouser, ComponentLink1URL=https://datasheet.ciiva.com/4507/sd05t1-d-241634-4507873.pdf?src-supplier=Mouser, ComponentLink2Description=https://datasheet.ciiva.com/16200/sd05t1-d-16200994.pdf?src-supplier=Future+Electronics, ComponentLink2URL=https://datasheet.ciiva.com/16200/sd05t1-d-16200994.pdf?src-supplier=Future+Electronics, ComponentLink3Description=https://datasheet.ciiva.com/15143/getdatasheetpartid-117154-15143559.pdf?src-supplier=Verical, ComponentLink3URL=https://datasheet.ciiva.com/15143/getdatasheetpartid-117154-15143559.pdf?src-supplier=Verical, ComponentLink4Description=https://datasheet.ciiva.com/30478/0900766b81250bd7-30478714.pdf?src-supplier=RSComponents, ComponentLink4URL=https://datasheet.ciiva.com/30478/0900766b81250bd7-30478714.pdf?src-supplier=RSComponents, ComponentLink5Description=https://datasheet.ciiva.com/339/sd05t1-d-339830.pdf?src-supplier=Digi-Key, ComponentLink5URL=https://datasheet.ciiva.com/339/sd05t1-d-339830.pdf?src-supplier=Digi-Key, ComponentLink6Description=https://datasheet.ciiva.com/339/sd05t1-d-339831.pdf?src-supplier=Digi-Key, ComponentLink6URL=https://datasheet.ciiva.com/339/sd05t1-d-339831.pdf?src-supplier=Digi-Key, ComponentLink7Description=https://datasheet.ciiva.com/11193/sd05t1-d-11193467.pdf?src-supplier=Avnet, ComponentLink7URL=https://datasheet.ciiva.com/11193/sd05t1-d-11193467.pdf?src-supplier=Avnet, ComponentLink8Description=https://datasheet.ciiva.com/22637/1878253-22637228.pdf?src-supplier=Element14, ComponentLink8URL=https://datasheet.ciiva.com/22637/1878253-22637228.pdf?src-supplier=Element14, ComponentLink9Description=https://datasheet.ciiva.com/25956/sd05t1-d-25956638.pdf?src-supplier=Avnet+Europe, ComponentLink9URL=https://datasheet.ciiva.com/25956/sd05t1-d-25956638.pdf?src-supplier=Avnet+Europe, Composition=Zener, Contact Plating=Tin, Depth=1.25mm, Direction=Unidirectional, Element Configuration=Single, ESD Protection=Yes, Height=1mm, Lead Free="Lead Free", Length=1.7mm, Manufacturer Part Number=SD05T1G, Max Reverse Leakage Current=10uA, Max Surge Current=24A, Number of Elements=1, Number of Pins=2, Number of Unidirectional Channels=1, Packaging="Tape and Reel", Peak Pulse Current=24A, Polarity=Unidirectional, Power Dissipation=350W, Pricing 1="1 = 0.49000, 10 = 0.36500, 100 = 0.20680, 500 = 0.13698, 1000 = 0.10502 (USD)", Radiation Hardening=No, REACH SVHC="No SVHC", Reverse Breakdown Voltage=6.2V, Reverse Standoff Voltage=5V, RoHS=Yes, Stock 1=61559, Supplier 1=Digi-Key, Termination=SMD/SMT, Voltage Rating (DC)=5V, Width=1.35mm, Working Voltage=5V
D4: library part SML-LXT0805GW-TR, "LED GREEN DIFFUSED SMD", Case/Package=0805, Case Code (Metric)=2012, Color=Green, Forward Current=20mA, Forward Voltage=2V, Lens Color=White, Manufacturer=Lumex, Max Operating Temperature=85°C, Min Operating Temperature=-25°C, Package Quantity=1, Power Rating=50mW, Supplier Part Number 1=67-1553-1-ND, Approvals=UL, Case Code (Imperial)=0805, Category=Optoelectronics, ComponentLink1Description=https://datasheet.ciiva.com/2110/sml-lxt0805gw-tr-2110192.pdf?src-supplier=Digi-Key, ComponentLink1URL=https://datasheet.ciiva.com/2110/sml-lxt0805gw-tr-2110192.pdf?src-supplier=Digi-Key, ComponentLink2Description=https://datasheet.ciiva.com/4689/sml-lxt0805gw-tr-82662-4689266.pdf?src-supplier=Mouser, ComponentLink2URL=https://datasheet.ciiva.com/4689/sml-lxt0805gw-tr-82662-4689266.pdf?src-supplier=Mouser, ComponentLink3Description=https://datasheet.ciiva.com/30063/sml-lxt0805gw-tr-30063898.pdf?src-supplier=Onlinecomponents.com, ComponentLink3URL=https://datasheet.ciiva.com/30063/sml-lxt0805gw-tr-30063898.pdf?src-supplier=Onlinecomponents.com, ComponentLink4Description=https://datasheet.ciiva.com/2110/sml-lxt0805gw-tr-2110193.pdf?src-supplier=Digi-Key, ComponentLink4URL=https://datasheet.ciiva.com/2110/sml-lxt0805gw-tr-2110193.pdf?src-supplier=Digi-Key, ComponentLink5Description=https://datasheet.ciiva.com/2110/sml-lxt0805gw-tr-2110194.pdf?src-supplier=Digi-Key, ComponentLink5URL=https://datasheet.ciiva.com/2110/sml-lxt0805gw-tr-2110194.pdf?src-supplier=Digi-Key, ComponentLink6Description=https://datasheet.ciiva.com/16383/sml-lxt0805gw-tr-16383723.pdf?src-supplier=Future+Electronics, ComponentLink6URL=https://datasheet.ciiva.com/16383/sml-lxt0805gw-tr-16383723.pdf?src-supplier=Future+Electronics, Dominant Wavelength=568nm, Height=0.8mm, Illumination Color=Green, Lead Free="Lead Free", Length=2mm, Lens Style=Rectangular, Lens Transparency=Diffused, Luminous Intensity=11mcd, Manufacturer Part Number=SML-LXT0805GW-TR, Mount="Surface Mount", Number of LEDs=1, Number of Pins=2, Packaging="Tape and Reel", Pricing 1="1 = 0.41000, 10 = 0.29000, 25 = 0.25160, 100 = 0.19360, 250 = 0.15732, 500 = 0.11616, 1000 = 0.09680 (USD)", REACH SVHC="No SVHC", RoHS=Yes, Stock 1=417501, Supplier 1=Digi-Key, Test Current=20mA, Viewing Angle=140°, Wavelength=565nm, Width=1.25mm
D5: library part SML-LXT0805YW-TR, "LED; Yellow; 10mcd; SMD; 100mA; 2.1V; 140deg; 585nm; Diffused; 5V; 50mW; -25degC", Case/Package=0805, Case Code (Metric)=2012, Color=Yellow, Forward Current=20mA, Forward Voltage=2.1V, Lens Color=White, Manufacturer=Lumex, Max Operating Temperature=85°C, Min Operating Temperature=-25°C, Package Quantity=1, Power Rating=50mW, Supplier Part Number 1=67-1554-1-ND, Approvals=UL, Case Code (Imperial)=0805, Category=Optoelectronics, ComponentLink1Description=https://datasheet.ciiva.com/4689/sml-lxt0805yw-tr-114463-4689131.pdf?src-supplier=Mouser, ComponentLink1URL=https://datasheet.ciiva.com/4689/sml-lxt0805yw-tr-114463-4689131.pdf?src-supplier=Mouser, ComponentLink2Description=https://datasheet.ciiva.com/15967/sml-lxt0805yw-tr-15967416.pdf?src-supplier=Onlinecomponents.com, ComponentLink2URL=https://datasheet.ciiva.com/15967/sml-lxt0805yw-tr-15967416.pdf?src-supplier=Onlinecomponents.com, ComponentLink3Description=https://datasheet.ciiva.com/2110/sml-lxt0805yw-tr-2110162.pdf?src-supplier=Digi-Key, ComponentLink3URL=https://datasheet.ciiva.com/2110/sml-lxt0805yw-tr-2110162.pdf?src-supplier=Digi-Key, ComponentLink4Description=https://datasheet.ciiva.com/8072/sml-lxt0805yw-tr-8072917.pdf?src-supplier=Element14, ComponentLink4URL=https://datasheet.ciiva.com/8072/sml-lxt0805yw-tr-8072917.pdf?src-supplier=Element14, ComponentLink5Description=https://datasheet.ciiva.com/2110/sml-lxt0805yw-tr-2110163.pdf?src-supplier=Digi-Key, ComponentLink5URL=https://datasheet.ciiva.com/2110/sml-lxt0805yw-tr-2110163.pdf?src-supplier=Digi-Key, ComponentLink6Description=https://datasheet.ciiva.com/2110/sml-lxt0805yw-tr-2110164.pdf?src-supplier=Digi-Key, ComponentLink6URL=https://datasheet.ciiva.com/2110/sml-lxt0805yw-tr-2110164.pdf?src-supplier=Digi-Key, ComponentLink7Description=https://datasheet.ciiva.com/30084/sml-lxt0805yw-tr-30084235.pdf?src-supplier=Onlinecomponents.com, ComponentLink7URL=https://datasheet.ciiva.com/30084/sml-lxt0805yw-tr-30084235.pdf?src-supplier=Onlinecomponents.com, ComponentLink8Description=https://datasheet.ciiva.com/14603/70127240-14603821.pdf?src-supplier=Allied+Electronics, ComponentLink8URL=https://datasheet.ciiva.com/14603/70127240-14603821.pdf?src-supplier=Allied+Electronics, Dominant Wavelength=585nm, Height=0.8mm, Illumination Color=Yellow, Lead Free="Lead Free", Length=2mm, Lens Style=Rectangular, Lens Transparency=Diffused, Luminous Intensity=10mcd, Manufacturer Part Number=SML-LXT0805YW-TR, Mount="Surface Mount", Number of LEDs=1, Number of Pins=2, Packaging="Tape and Reel", Pricing 1="1 = 0.38000, 10 = 0.27100, 25 = 0.23440, 100 = 0.18040, 250 = 0.14656, 500 = 0.10824, 1000 = 0.09020 (USD)", REACH SVHC="No SVHC", RoHS=Yes, Stock 1=129042, Supplier 1=Digi-Key, Test Current=20mA, Viewing Angle=140°, Wavelength=585nm, Width=1.25mm
D6: library part SML-LXT0805SRW-TR, "LED RED DIFFUSED 0805 SMD", Case/Package=0805, Case Code (Metric)=2012, Color=Red, Forward Current=20mA, Forward Voltage=1.8V, Lens Color=White, Manufacturer=Lumex, Max Operating Temperature=80°C, Min Operating Temperature=-25°C, Package Quantity=1, Power Rating=80mW, Supplier Part Number 1=67-1555-1-ND, Case Code (Imperial)=0805, Category=Optoelectronics, ComponentLink1Description=https://datasheet.ciiva.com/15967/smllxt0805srwtr-15967412.pdf?src-supplier=Onlinecomponents.com, ComponentLink1URL=https://datasheet.ciiva.com/15967/smllxt0805srwtr-15967412.pdf?src-supplier=Onlinecomponents.com, ComponentLink2Description=https://datasheet.ciiva.com/4688/sml-lxt0805srw-tr-114457-4688733.pdf?src-supplier=Mouser, ComponentLink2URL=https://datasheet.ciiva.com/4688/sml-lxt0805srw-tr-114457-4688733.pdf?src-supplier=Mouser, ComponentLink3Description=https://datasheet.ciiva.com/2110/sml-lxt0805srw-tr-2110039.pdf?src-supplier=Digi-Key, ComponentLink3URL=https://datasheet.ciiva.com/2110/sml-lxt0805srw-tr-2110039.pdf?src-supplier=Digi-Key, ComponentLink4Description=https://datasheet.ciiva.com/2110/sml-lxt0805srw-tr-2110040.pdf?src-supplier=Digi-Key, ComponentLink4URL=https://datasheet.ciiva.com/2110/sml-lxt0805srw-tr-2110040.pdf?src-supplier=Digi-Key, ComponentLink5Description=https://datasheet.ciiva.com/2110/sml-lxt0805srw-tr-2110041.pdf?src-supplier=Digi-Key, ComponentLink5URL=https://datasheet.ciiva.com/2110/sml-lxt0805srw-tr-2110041.pdf?src-supplier=Digi-Key, ComponentLink6Description=https://datasheet.ciiva.com/16376/sml-lxt0805srw-tr-16376845.pdf?src-supplier=Future+Electronics, ComponentLink6URL=https://datasheet.ciiva.com/16376/sml-lxt0805srw-tr-16376845.pdf?src-supplier=Future+Electronics, Height=0.8mm, Illumination Color=Red, Lead Free="Lead Free", Length=2mm, Lens Style=Diffused, Lens Transparency=Diffused, Luminous Intensity=21mcd, Manufacturer Part Number=SML-LXT0805SRW-TR, Mount="Surface Mount", Number of LEDs=1, Number of Pins=2, Packaging="Tape and Reel", Pricing 1="1 = 0.51000, 10 = 0.36600, 25 = 0.28080, 100 = 0.18320, 250 = 0.13432, 500 = 0.11396, 1000 = 0.09361 (USD)", REACH SVHC="No SVHC", RoHS=Yes, Stock 1=60948, Supplier 1=Digi-Key, Test Current=20mA, Viewing Angle=140°, Wavelength=660nm, Width=1.25mm
D7 D8 D9: library part CGRKM4001-HF, "DIODE GEN PURP 50V 1A SOD123F", Average Rectified Current=1A, Manufacturer=Comchip, Max Reverse Voltage (DC)=50V, Package Quantity=2500, Supplier Part Number 1=641-1511-1-ND, Category="Discrete Semiconductor Products", ComponentLink1Description=http://www.mouser.com/ds/2/80/CGRKM4001-HF%20Thru.%20CGRKM4007-HF%20RevG-531933.pdf?src-supplier=Mouser, ComponentLink1URL=http://www.mouser.com/ds/2/80/CGRKM4001-HF%20Thru.%20CGRKM4007-HF%20RevG-531933.pdf?src-supplier=Mouser, ComponentLink2Description="http://www.comchiptech.com/admin/files/product/CGRKM4001-HF Thru. CGRKM4007-HF RevG.pdf?src-supplier=Digi-Key", ComponentLink2URL="http://www.comchiptech.com/admin/files/product/CGRKM4001-HF Thru. CGRKM4007-HF RevG.pdf?src-supplier=Digi-Key", Manufacturer Part Number=CGRKM4001-HF, Mount="Surface Mount", Packaging="Tape and Reel", Pricing 1="1 = 0.35000, 10 = 0.32200, 100 = 0.18030, 500 = 0.09656, 1000 = 0.06566 (USD)", RoHS=Yes, Stock 1=8991, Supplier 1=Digi-Key
F1 F2: library part 0031.7701.11, "SCHURTER - 0031.7701.11 - FUSE HOLDER, PCB MOUNT", Color=White, Current Rating=5A, Manufacturer=Schurter, Max Operating Temperature=85°C, Min Operating Temperature=-40°C, Package Quantity=100, Supplier Part Number 1=486-1991-ND, Voltage=125V, Body Material=Thermoplastic, Category="Circuit Protection", ComponentLink1Description=https://datasheet.ciiva.com/1270/typ-omh-125-1270896.pdf?src-supplier=Element14, ComponentLink1URL=https://datasheet.ciiva.com/1270/typ-omh-125-1270896.pdf?src-supplier=Element14, ComponentLink2Description=https://datasheet.ciiva.com/7496/typ-omh-125-7496724.pdf?src-supplier=Digi-Key, ComponentLink2URL=https://datasheet.ciiva.com/7496/typ-omh-125-7496724.pdf?src-supplier=Digi-Key, ComponentLink3Description=https://datasheet.ciiva.com/16215/typ-omh-125-16215096.pdf?src-supplier=Onlinecomponents.com, ComponentLink3URL=https://datasheet.ciiva.com/16215/typ-omh-125-16215096.pdf?src-supplier=Onlinecomponents.com, ComponentLink4Description=https://datasheet.ciiva.com/30058/73typ-omh-125-30058618.pdf?src-supplier=Onlinecomponents.com, ComponentLink4URL=https://datasheet.ciiva.com/30058/73typ-omh-125-30058618.pdf?src-supplier=Onlinecomponents.com, ComponentLink5Description=https://datasheet.ciiva.com/14128/awomh125-data-e-14128364.pdf?src-supplier=Distrelec, ComponentLink5URL=https://datasheet.ciiva.com/14128/awomh125-data-e-14128364.pdf?src-supplier=Distrelec, ComponentLink6Description=https://datasheet.ciiva.com/1221/1925349-1221826.pdf?src-supplier=Newark, ComponentLink6URL=https://datasheet.ciiva.com/1221/1925349-1221826.pdf?src-supplier=Newark, ComponentLink7Description=https://datasheet.ciiva.com/3014/typ-omh-125-3014522.pdf?src-supplier=Avnet, ComponentLink7URL=https://datasheet.ciiva.com/3014/typ-omh-125-3014522.pdf?src-supplier=Avnet, ComponentLink8Description=https://datasheet.ciiva.com/4480/typ-omh-125-4480427.pdf?src-supplier=Mouser, ComponentLink8URL=https://datasheet.ciiva.com/4480/typ-omh-125-4480427.pdf?src-supplier=Mouser, ComponentLink9Description=https://datasheet.ciiva.com/17405/typ-omh-125-17405484.pdf?src-supplier=Avnet+Europe, ComponentLink9URL=https://datasheet.ciiva.com/17405/typ-omh-125-17405484.pdf?src-supplier=Avnet+Europe, ComponentLink10Description=Digikey, ComponentLink10URL=https://www.digikey.ca/product-detail/en/schurter-inc/0031.7701.11/486-1991-ND/640027, Contact Material="Copper Alloy", Contact Plating=Tin, Depth=5.2mm, Fuse Current=5A, Height=6mm, Illumination Type=Illuminated, Lead Free="Lead Free", Length=12mm, Manufacturer Part Number=0031.7701.11, Material=Tin, Mount="Surface Mount", Number of Circuits=1, Number of Poles=1, Packaging=Bulk, Pricing 1="1 = 1.39000, 50 = 1.03400, 100 = 0.93100, 500 = 0.70300, 1000 = 0.52080 (USD)", Radiation Hardening=No, REACH SVHC="No SVHC", RoHS=Yes, Stock 1=11381, Supplier 1=Digi-Key, Terminal Material=Brass, Termination=SMD/SMT, Voltage Rating=125V, Voltage Rating (AC)=125V, Voltage Rating (DC)=125V, Weight=0.016932oz, Width=5.2mm
J1: library part 70553-0001, "Headers & Wire Housings R/A HDR 2P low profile single", Color=Black, Contact Resistance=30mR, Current Rating=3A, Flammability Rating="UL94 V-0", Insulation Resistance=1GR, Manufacturer=Molex, Max Operating Temperature=105°C, Min Operating Temperature=-40°C, Package Quantity=2880, Supplier Part Number 1=WM4900-ND, Voltage Rating=250V, Approvals=UL, Category=Connectors, ComponentLink1Description=https://datasheet.ciiva.com/5158/0705530001-pcb-headers-172944-5158768.pdf?src-supplier=Mouser, ComponentLink1URL=https://datasheet.ciiva.com/5158/0705530001-pcb-headers-172944-5158768.pdf?src-supplier=Mouser, ComponentLink2Description=https://datasheet.ciiva.com/11746/0900766b80d8d649-11746625.pdf?src-supplier=RSComponents, ComponentLink2URL=https://datasheet.ciiva.com/11746/0900766b80d8d649-11746625.pdf?src-supplier=RSComponents, ComponentLink3Description=https://datasheet.ciiva.com/16657/0705530001-pcb-headers-16657777.pdf?src-supplier=Avnet+Europe, ComponentLink3URL=https://datasheet.ciiva.com/16657/0705530001-pcb-headers-16657777.pdf?src-supplier=Avnet+Europe, ComponentLink4Description=https://datasheet.ciiva.com/7920/ps-70541-7920854.pdf?src-supplier=Element14, ComponentLink4URL=https://datasheet.ciiva.com/7920/ps-70541-7920854.pdf?src-supplier=Element14, ComponentLink5Description=https://datasheet.ciiva.com/30195/179180705530001-pcb-headers-30195548.pdf?src-supplier=Onlinecomponents.com, ComponentLink5URL=https://datasheet.ciiva.com/30195/179180705530001-pcb-headers-30195548.pdf?src-supplier=Onlinecomponents.com, ComponentLink6Description=https://datasheet.ciiva.com/1438/1887076-1438989.pdf?src-supplier=Element14, ComponentLink6URL=https://datasheet.ciiva.com/1438/1887076-1438989.pdf?src-supplier=Element14, ComponentLink7Description=https://datasheet.ciiva.com/10090/0705530001-pcb-headers-10090317.pdf?src-supplier=Avnet, ComponentLink7URL=https://datasheet.ciiva.com/10090/0705530001-pcb-headers-10090317.pdf?src-supplier=Avnet, ComponentLink8Description=Digikey, ComponentLink8URL=https://www.digikey.com/product-detail/en/molex/0705530001/WM4900-ND/114951, Contact Material=Bronze, Contact Plating=Gold, ELV=Compliant, Gender=Male, Glow Wire Compliant=Non-compliant, Housing Color=Black, Housing Material=Thermoplastic, Lead Free="Lead Free", Manufacturer Part Number=70553-0001, Material=Brass, Mount="Through Hole", Number of Circuits=2, Number of Contacts=2, Number of Positions=2, Number of Rows=1, Orientation="Right Angle", Packaging=Rail/Tube, Pitch=2.54mm, Pricing 1="1 = 0.71000, 72 = 0.53486, 144 = 0.51264, 504 = 0.44575, 1008 = 0.36775, 5040 = 0.32318, 10008 = 0.30089 (USD)", Radiation Hardening=No, REACH SVHC=Unknown, RoHS=Yes, Stock 1=15280, Supplier 1=Digi-Key, Termination="Through Hole", Voltage Rating (DC)=250V
J2 J3 J6: library part 0901200763, "CONN HEADER VERT 3POS 2.54MM", Color=Black, Contact Resistance=20mR, Current Rating=3A, Flammability Rating="UL94 V-2", Insulation Resistance=5GR, Manufacturer=Molex, Manufacturer Part Number=90120-0763, Max Operating Temperature=125°C, Max Voltage Rating (DC)=350.35kV, Min Operating Temperature=-55°C, Package Quantity=3000, Supplier Part Number 1=WM8085-ND, Voltage Rating=350V, Category=Connectors, ComponentLink1Description=https://datasheet.ciiva.com/30177/19330901200763-pcb-headers-30177538.pdf?src-supplier=Onlinecomponents.com, ComponentLink1URL=https://datasheet.ciiva.com/30177/19330901200763-pcb-headers-30177538.pdf?src-supplier=Onlinecomponents.com, ComponentLink2Description=https://datasheet.ciiva.com/11747/0900766b8002f268-11747896.pdf?src-supplier=RSComponents, ComponentLink2URL=https://datasheet.ciiva.com/11747/0900766b8002f268-11747896.pdf?src-supplier=RSComponents, ComponentLink3Description=https://datasheet.ciiva.com/5150/0901200763-pcb-headers-230143-5150559.pdf?src-supplier=Mouser, ComponentLink3URL=https://datasheet.ciiva.com/5150/0901200763-pcb-headers-230143-5150559.pdf?src-supplier=Mouser, Contact Material=Brass, Contact Plating=Tin, Gender=Male, Glow Wire Compliant=Non-compliant, Halogen Free="Not Halogen Free", Housing Color=Black, Housing Material=Polyester, Lead Free="Lead Free", Lead Pitch=2.54mm, Material=Glass, Mount="Through Hole", Number of Circuits=2, Number of Contacts=3, Number of Poles=3, Number of Positions=3, Number of Rows=1, Orientation=Straight, Packaging=Tray, Pitch=2.54mm, Pricing 1="1 = 0.90000, 10 = 0.79100, 100 = 0.68200, 500 = 0.55800, 1000 = 0.49600, 5000 = 0.43400, 10000 = 0.41230 (USD)", Radiation Hardening=No, REACH SVHC=Unknown, RoHS=Yes, Stock 1=17038, Supplier 1=Digi-Key, Termination=Solder, Voltage Rating (AC)=350V, Voltage Rating (DC)=350V, Working Voltage=350V